# Altium PCB download_stlink.PcbDoc
Units mil, origin at the board's own origin, x right, y up, seen from the top; angles counter-clockwise.
Board outline 6000 x 4000 mil, 2 copper layers (Top Layer, Bottom Layer); 2 components, 4 nets, 12 pads, 0 vias.
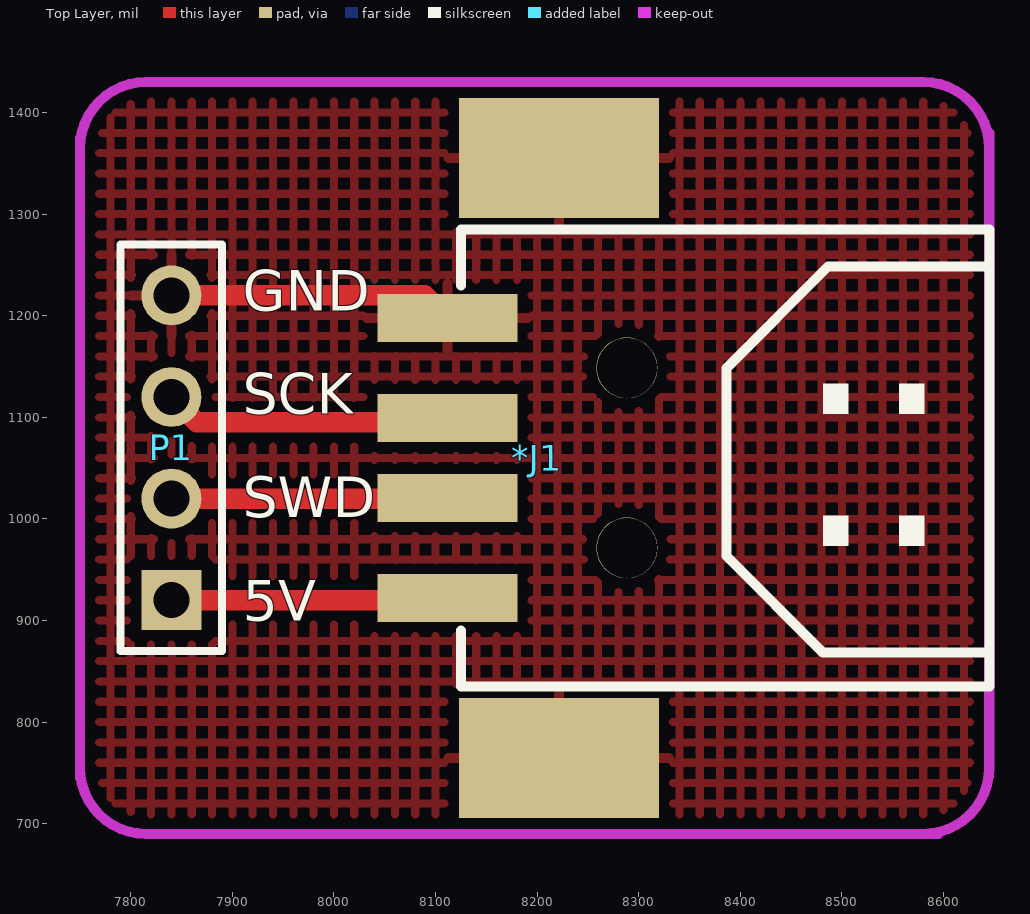
[diagram p0: Top Layer view]
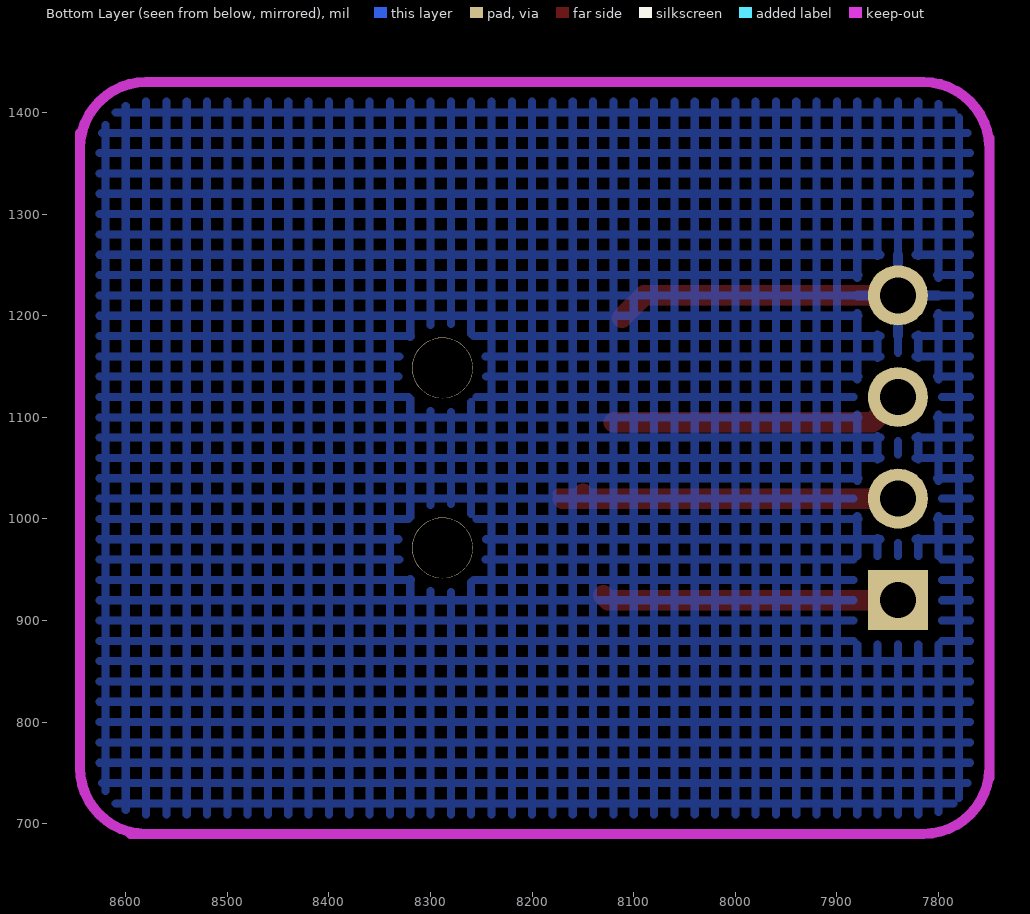
[diagram p1: Bottom Layer view, seen from below]

## Layer stack, top to bottom
Top Layer: signal copper 1.4
Dielectric: dielectric 12.6, FR-4, Dk 4.8
Bottom Layer: signal copper 1.4

## Board outline
1000,1000 7000,1000 7000,5000 1000,5000

## Design rules (kind name [scope] priority, off if disabled: settings)
Clearance [All] p1: gap=10
ComponentClearance [All] p1: gap=10 collisioncheckmode=3 verticalgap=10
PolygonConnect [All] p1: connectstyle=Relief reliefconductorwidth=10 reliefentries=4 polygonreliefangle="90 Angle"
RoutingVias [All] p1: holewidth=28 width=50 viastyle="Through Hole" minholewidth=28 minwidth=50 maxholewidth=28 maxwidth=50
SolderMaskExpansion [All] p1: expansion=4
TestPointUsage [All] p1: valid=0 allowmultiple=FALSE
Testpoint [All] p1: side=15 testpointundercomponent=TRUE minsize=40 maxsize=100 preferedsize=60 minholesize=0 maxholesize=40 preferedholesize=32 testpointgrid=1 style=1023 order=0-112345678
Width [All] p1: maxlimit=10 minlimit=10 preferedwidth=10
18 further rules are at their usual default settings.

## Components (designator, comment, footprint, x,y, rotation, side; value= is the part's Value field where it differs from the comment)
*J1 "usb" USB-A1 8200,1060 r90 top
P1 "HDR1X4" HDR1X4 7840,920 r90 top

## Footprints (in the part's own frame and the unit in brackets; to place one, negate y for a bottom-side part, rotate by r counter-clockwise, add the part's x,y. Pads: shape width x height; smd on the part's side, far side on the other; paste and mask are expansions set on the pad)
HDR1X4 [mm]
  rect 1.5x1.5 hole 0.9: 1(0,0)
  round 1.5 hole 0.9: 2(2.54,0) 3(5.08,0) 4(7.62,0)
  silkscreen extent -1.27,-1.27 8.89,1.27
USB-A1 [mm]
  rect 1.2x3.5 smd: 1(-3.5,2.243) 2(-1,2.243) 3(1,2.243) 4(3.5,2.243)
  rect 3x5 smd: 5(7.5,-0.542) 6(-7.5,-0.542)
  round 1.524 hole 1.5 unplated: 7(-2.25,-2.243) 8(2.25,-2.243)
  silkscreen extent -5.71,-11.3 5.72,1.9

## Part data
P1: library part MHDR1X4, "Header, 4-Pin"

## Nets (pads, with @x,y where several pads share a name; then routed paths per layer and width w, separated by ;. In a path a pad name is that pad's centre, name@x,y a point inside that pad or via, vN(x,y) a via of type N, cw(c..) or ccw(c..) an arc to the next point about the centre after c; other vN are vias at no path point)
GND: *J1.4 *J1.5 *J1.6 P1.4 | length 280.9
  Top Layer w20: P1.4 8089.51,1220 *J1.4
Net*J1_1: *J1.1 P1.1 | length 292.1
  Top Layer w20: P1.1 8125,920 *J1.1@8130,925
Net*J1_2: *J1.2 P1.2 | length 369.1
  Top Layer w10: *J1.2@8150,1025 8175,1025 *J1.2@8170,1020
  Top Layer w20: P1.2 *J1.2@8170,1020 ; *J1.2@8145,1020 *J1.2@8150,1025
Net*J1_3: *J1.3 P1.3 | length 290.4
  Top Layer w20: P1.3 7865,1095 *J1.3@8120,1095
pads on no net: *J1.7 *J1.8

## Polygon pours and split planes (outlines as drawn)
GND on Top Layer "Bottom Layer-No Net" (hatched 90Degree grid 20 track 8, remove dead copper, pour order 1000): 7719.74,1541 7719.74,761 7799.74,681 8824.74,681 8874.74,731 8889.74,746 8889.74,1536
GND on Bottom Layer "Bottom Layer-No Net" (hatched 90Degree grid 20 track 8, remove dead copper, pour order 1001): 7664,1466 7664,656 7744,576 7759,561 8844,561 8844,1521 8839,1526

## Keep-outs
Keep-Out Layer:
  lines w10: 7750,745 7750,1375 ; 7750,755 ccw(c7815,755) 7815,690 8330,690 8595,690 ; 7750,1365 cw(c7815,1365) 7815,1430 8310,1430 8580,1430 cw(c8580,1365) 8645,1365 ; 8580,690 ccw(c8580,755) 8645,755 8645,1380

## Silkscreen, mask and mechanical layers (free items; w line width, h text height)
Top Overlay:
  text "GND" at 7910,1205 h40
  text "SCK" at 7910,1103.33 h40
  text "SWD" at 7910,1001.67 h40
  text "5V" at 7910,900 h40